# EAGLE board PCB_Grupo_6 (EAGLE 9.6.2)
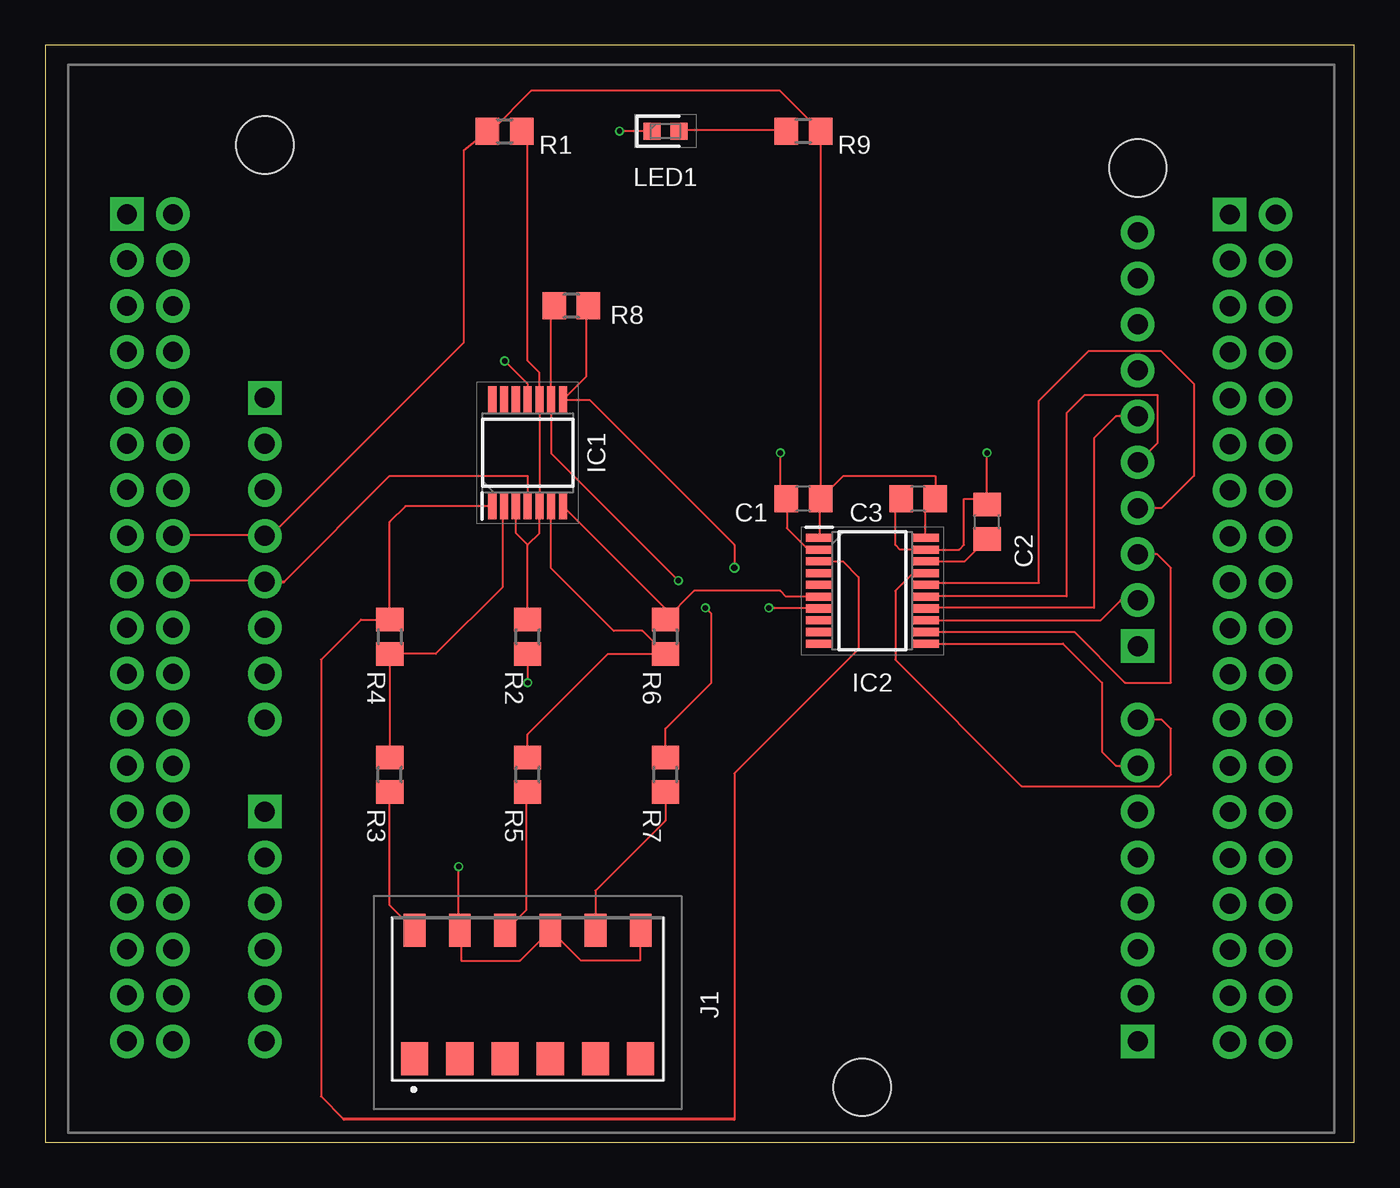
[diagram p0: board, top side]
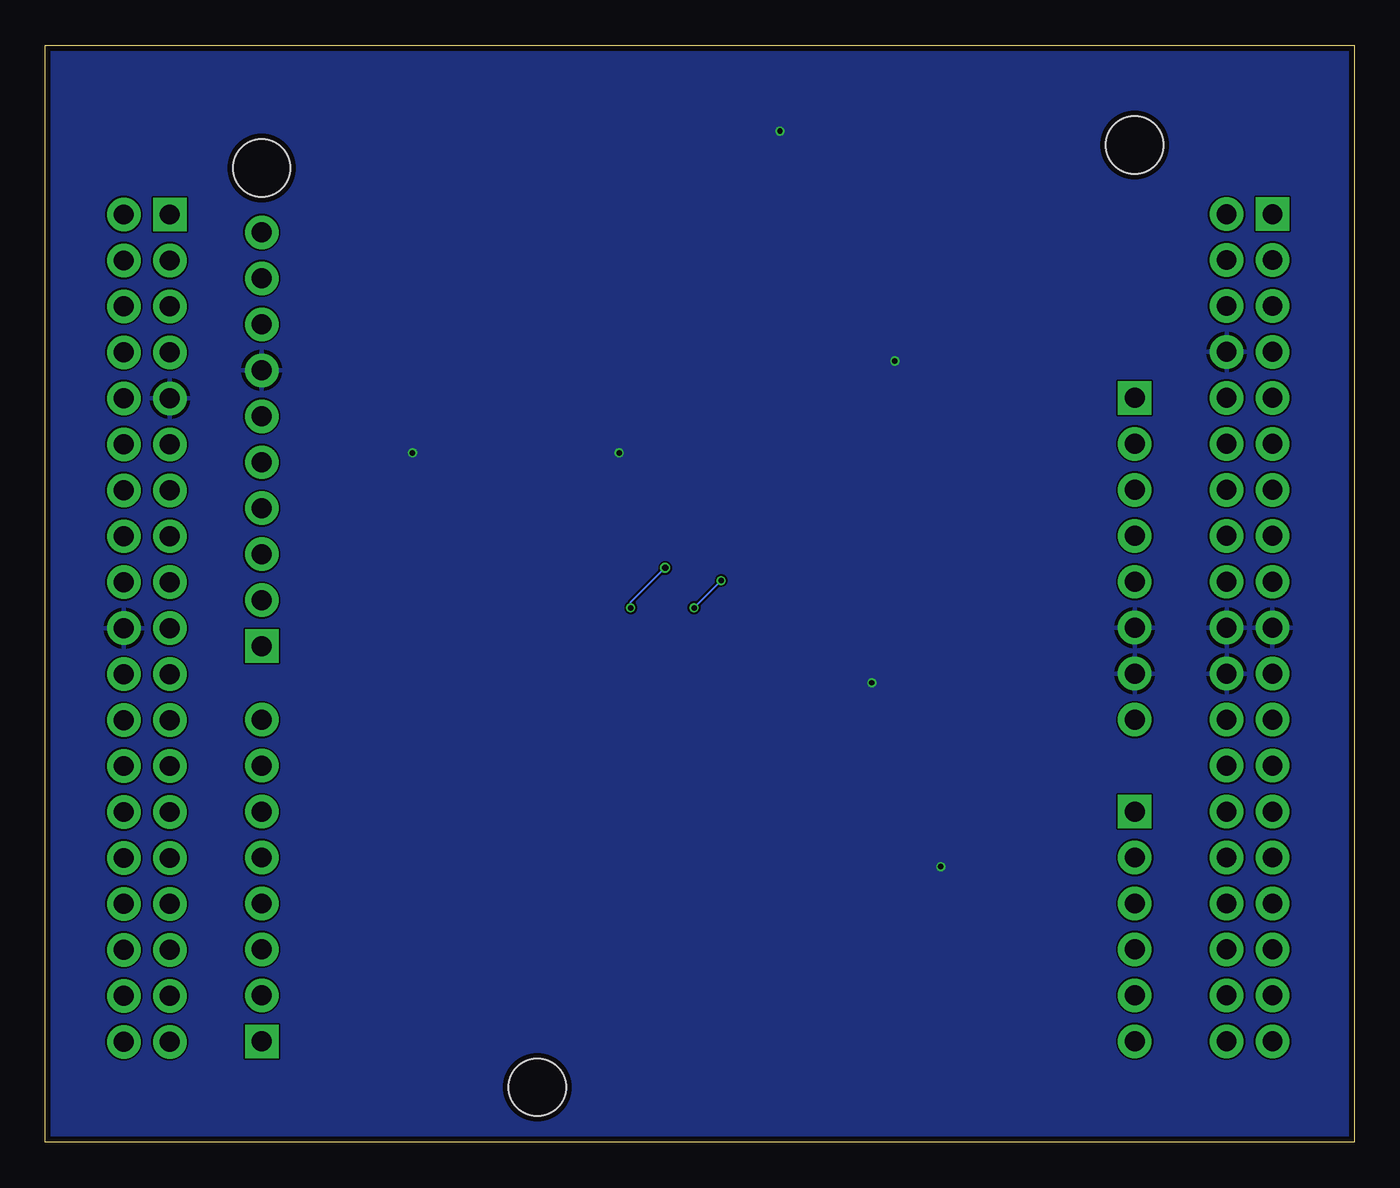
[diagram p1: board, bottom side, seen from below]

Size 72.37 x 60.63 mm. Coordinates in mm from the lower left corner, seen from the top.
Outline: 0,0 72.37,0 72.37,60.63 0,60.63 0,0
Copper layers (1*16): Top 0.035mm / dielectric 1.5mm / Bottom 0.035mm
Design rules "PCBWay_2L_100um-Track *": minimum track width 0.1mm, minimum drill 0.3mm, track to track 0.1mm, track to pad 0.1mm, pad to pad 0.1mm, via to via 0.1mm, smd to smd 0mil, copper to edge 0.3mm, drill to drill 10mil, minimum pad ring 6mil, minimum via ring 0.1mm, stop-mask expansion 2mil, vias tented up to drill 0.3mm, thermal gap 0.2mm

## Footprints (pad centres in the part's own frame; a part is rotated, then mirrored left to right if it is on the bottom)
C0805 = smd 1.3 x 1.5: 1 -0.95,0; 2 0.95,0
SOP65P640X120-14N = smd 1.475 x 0.45: 1 -2.938,1.95; 2 -2.938,1.3; 3 -2.938,0.65; 4 -2.938,0; 5 -2.938,-0.65; 6 -2.938,-1.3; 7 -2.938,-1.95; 8 2.938,-1.95; 9 2.938,-1.3; 10 2.938,-0.65; 11 2.938,0; 12 2.938,0.65; 13 2.938,1.3; 14 2.938,1.95
SOP65P640X120-20N = smd 1.475 x 0.45: 1 -2.938,2.925; 2 -2.938,2.275; 3 -2.938,1.625; 4 -2.938,0.975; 5 -2.938,0.325; 6 -2.938,-0.325; 7 -2.938,-0.975; 8 -2.938,-1.625; 9 -2.938,-2.275; 10 -2.938,-2.925; 11 2.938,-2.925; 12 2.938,-2.275; 13 2.938,-1.625; 14 2.938,-0.975; 15 2.938,-0.325; 16 2.938,0.325; 17 2.938,0.975; 18 2.938,1.625; 19 2.938,2.275; 20 2.938,2.925
009276006021106 = smd 1.5 x 1.8: 1 -6.25,-3; 3 -3.75,-3; 5 -1.25,-3; 7 1.25,-3; 9 3.75,-3; 11 6.25,-3 | smd 1.2 x 1.8: 2 -6.25,4.1; 4 -3.75,4.1; 6 -1.25,4.1; 8 1.25,4.1; 10 3.75,4.1; 12 6.25,4.1
LEDC1608X80N = smd 0.95 x 0.95: 1 -0.75,0; 2 0.75,0
NUCLEO-64 = drill 1.1 pad 1.85 square: CN5-1 59.13,24.884; CN6-1 10.87,38.6; CN7-1 3.25,48.76; CN8-1 10.87,15.74; CN9-1 59.13,3.04; CN10-1 64.21,48.735 | drill 1.1 pad 1.85: CN5-2 59.13,27.424; CN5-3 59.13,29.964; CN5-4 59.13,32.504; CN5-5 59.13,35.044; CN5-6 59.13,37.584; CN5-7 59.13,40.124; CN5-8 59.13,42.664; CN5-9 59.13,45.204; CN5-10 59.13,47.744; CN6-2 10.87,36.06; CN6-3 10.87,33.52; CN6-4 10.87,30.98; CN6-5 10.87,28.44; CN6-6 10.87,25.9; CN6-7 10.87,23.36; CN6-8 10.87,20.82; CN7-2 5.79,48.76; CN7-3 3.25,46.22; CN7-4 5.79,46.22; CN7-5 3.25,43.68; CN7-6 5.79,43.68; CN7-7 3.25,41.14; CN7-8 5.79,41.14; CN7-9 3.25,38.6; CN7-10 5.79,38.6; CN7-11 3.25,36.06; CN7-12 5.79,36.06; CN7-13 3.25,33.52; CN7-14 5.79,33.52; CN7-15 3.25,30.98; CN7-16 5.79,30.98; CN7-17 3.25,28.44; CN7-18 5.79,28.44; CN7-19 3.25,25.9; CN7-20 5.79,25.9; CN7-21 3.25,23.36; CN7-22 5.79,23.36; CN7-23 3.25,20.82; CN7-24 5.79,20.82; CN7-25 3.25,18.28; CN7-26 5.79,18.28; CN7-27 3.25,15.74; CN7-28 5.79,15.74; CN7-29 3.25,13.2; CN7-30 5.79,13.2; CN7-31 3.25,10.66; CN7-32 5.79,10.66; CN7-33 3.25,8.12; CN7-34 5.79,8.12; CN7-35 3.25,5.58; CN7-36 5.79,5.58; CN7-37 3.25,3.04; CN7-38 5.79,3.04; CN8-2 10.87,13.2; CN8-3 10.87,10.66; CN8-4 10.87,8.12; CN8-5 10.87,5.58; CN8-6 10.87,3.04; CN9-2 59.13,5.58; CN9-3 59.13,8.12; CN9-4 59.13,10.66; CN9-5 59.13,13.2; CN9-6 59.13,15.74; CN9-7 59.13,18.28; CN9-8 59.13,20.82; CN10-2 66.75,48.735; CN10-3 64.21,46.195; CN10-4 66.75,46.195; CN10-5 64.21,43.655; CN10-6 66.75,43.655; CN10-7 64.21,41.115; CN10-8 66.75,41.115; CN10-9 64.21,38.575; CN10-10 66.75,38.575; CN10-11 64.21,36.035; CN10-12 66.75,36.035; CN10-13 64.21,33.495; CN10-14 66.75,33.495; CN10-15 64.21,30.955; CN10-16 66.75,30.955; CN10-17 64.21,28.415; CN10-18 66.75,28.415; CN10-19 64.21,25.875; CN10-20 66.75,25.875; CN10-21 64.21,23.335; CN10-22 66.75,23.335; CN10-23 64.21,20.795; CN10-24 66.75,20.795; CN10-25 64.21,18.255; CN10-26 66.75,18.255; CN10-27 64.21,15.715; CN10-28 66.75,15.715; CN10-29 64.21,13.175; CN10-30 66.75,13.175; CN10-31 64.21,10.635; CN10-32 66.75,10.635; CN10-33 64.21,8.095; CN10-34 66.75,8.095; CN10-35 64.21,5.555; CN10-36 66.75,5.555; CN10-37 64.21,3.015; CN10-38 66.75,3.015 | hole 3.175: 59.13,51.3; 10.87,52.57; 43.89,0.5
R0805 = smd 1.3 x 1.5: 1 -0.95,0; 2 0.95,0

## Placement (x,y rotation side)
C1  1uF  [C0805]  41.91,35.56 180 top
C2  220nF  [C0805]  52.07,34.29 90 top
C3  1uF  [C0805]  48.26,35.56 180 top
IC1  AD8574TRUZ-EP  [SOP65P640X120-14N]  26.67,38.1 90 top
IC2  ADS131M03IPWR  [SOP65P640X120-20N]  45.72,30.48 0 top
J1  009276006021106  [009276006021106]  26.67,7.62 0 top
LED1  150060GS75000  [LEDC1608X80N]  34.29,55.88 0 top
M1  [NUCLEO-64]  1.27,2.54 0 top
R1  1k  [R0805]  25.4,55.88 0 top
R2  2k2  [R0805]  26.67,27.94 90 top
R3  1k  [R0805]  19.05,20.32 90 top
R4  2k2  [R0805]  19.05,27.94 270 top
R5  1k  [R0805]  26.67,20.32 90 top
R6  2k2  [R0805]  34.29,27.94 270 top
R7  1k  [R0805]  34.29,20.32 90 top
R8  2k2  [R0805]  29.08,46.23 180 top
R9  12  [R0805]  41.91,55.88 180 top

## Library data of the parts
C1 C3 = rcl; PARTNO: C1206C105K3RAC7215; SPICEPREFIX: C
C2 = rcl; PARTNO: 885382207008; SPICEPREFIX: C
IC1 = SamacSys_Parts; ARROW_PART_NUMBER: AD8574TRUZ-EP; ARROW_PRICE-STOCK: https://www.arrow.com/en/products/ad8574truz-ep/analog-devices?region=nac; DESCRIPTION: Amplificateurs oprationnels - Amplis-Op QUAD PRECISION RAIL RAIL CHOPPER OP AMP; HEIGHT: 1.2mm; MANUFACTURER_NAME: Analog Devices; MANUFACTURER_PART_NUMBER: AD8574TRUZ-EP; MOUSER_PART_NUMBER: 584-AD8574TRUZ-EP; MOUSER_PRICE-STOCK: https://www.mouser.co.uk/ProductDetail/Analog-Devices/AD8574TRUZ-EP?qs=wUXugUrL1qxNfkZ2pBeSrA%3D%3D
IC2 = SamacSys_Parts; DESCRIPTION: Analog to Digital Converters - ADC 24-bit, 32-kSPS, 3-channel, simultaneous-sampling, delta-sigma ADC; HEIGHT: 1.2mm; MANUFACTURER_NAME: Texas Instruments; MANUFACTURER_PART_NUMBER: ADS131M03IPWR; MOUSER_PART_NUMBER: 595-ADS131M03IPWR; MOUSER_PRICE-STOCK: https://www.mouser.co.uk/ProductDetail/Texas-Instruments/ADS131M03IPWR?qs=Jslch3jnSjnSosXolUzTvg%3D%3D
J1 = SamacSys_Parts; ARROW_PART_NUMBER: 009276006021106; ARROW_PRICE-STOCK: https://www.arrow.com/en/products/009276006021106/avx?region=nac; DESCRIPTION: AVX INTERCONNECT - 009276006021106 - CONNECTOR, IDC, 6 WAY, 18 AWG; HEIGHT: 5mm; MANUFACTURER_NAME: AVX; MANUFACTURER_PART_NUMBER: 009276006021106; MOUSER_PART_NUMBER: 581-009276006021106; MOUSER_PRICE-STOCK: https://www.mouser.co.uk/ProductDetail/AVX/009276006021106?qs=QtI0yD1FyOMc2fy6i4jFlw%3D%3D
LED1 = SamacSys_Parts; DESCRIPTION: Wurth Elektronik WL-SMCW 520 nm Green LED, 1608 (0603) Clear SMD package; HEIGHT: 0.8mm; MANUFACTURER_NAME: Wurth Elektronik; MANUFACTURER_PART_NUMBER: 150060GS75000; MOUSER_PART_NUMBER: 710-150060GS75000; MOUSER_PRICE-STOCK: https://www.mouser.co.uk/ProductDetail/Wurth-Elektronik/150060GS75000?qs=LlUlMxKIyB0UYkq5lDO8nA%3D%3D
M1 = NUCLEO-L452RE
R1 R3 R5 R7 = rcl; PARTNO: TNPW04021K15BYEP; SPICEPREFIX: R
R2 R4 R6 R8 = rcl; PARTNO: RP0603BRD072K2L; SPICEPREFIX: R
R9 = rcl; PARTNO: RT0603DRE0712RL; SPICEPREFIX: R

## Nets
+1V: IC1.3 IC1.5 IC1.10 R1.2 R2.2
+3V3: C1.1 C3.1 IC2.1 IC2.20 M1.CN6-4 M1.CN7-16 R1.1 R9.1
+5V: IC1.4 M1.CN6-5 M1.CN7-18
AGND: M1.CN10-32
AVDD: M1.CN10-7
G1+: J1.3
G1-: J1.1
G2+: J1.7
G2-: J1.5
G3+: J1.11
G3-: J1.9
GND: C1.2 C2.2 C3.2 IC1.11 IC2.2 IC2.19 J1.4 J1.8 J1.12 LED1.1 M1.CN5-7 M1.CN6-6 M1.CN6-7 M1.CN7-8 M1.CN7-19 M1.CN7-20 M1.CN7-22 M1.CN10-9 M1.CN10-20 R2.1
N$1: IC1.1 IC2.3 R4.1
N$2: IC1.7 IC2.6 R6.1
N$3: IC1.8 IC2.7 R8.1
N$4: IC1.2 R3.2 R4.2
N$5: M1.CN6-2
N$6: IC1.9 R7.2 R8.2
N$7: IC1.6 R5.2 R6.2
N$8: M1.CN6-8
N$9: M1.CN5-8
N$10: J1.2 R3.1
N$11: IC2.14 M1.CN5-6
N$12: J1.6 R5.1
N$13: IC2.4
N$14: J1.10 R7.1
N$15: IC2.13 M1.CN5-2
N$16: IC2.12 M1.CN5-3
N$17: LED1.2 R9.2
N$18: M1.CN6-3
N$19: IC1.14
N$20: IC1.13
N$21: IC1.12
N$22: IC2.9
N$23: IC2.10
N$24: IC2.5
N$25: IC2.8
N$26: C2.1 IC2.18
N$27: IC2.17 M1.CN9-8
N$28: IC2.11 M1.CN9-7
N$29: IC2.16 M1.CN5-4
N$30: IC2.15 M1.CN5-5
N$33: M1.CN9-6
N$34: M1.CN9-5
N$35: M1.CN9-4
N$36: M1.CN9-3
N$37: M1.CN9-2
N$38: M1.CN9-1
N$39: M1.CN5-1
N$41: M1.CN5-10
N$42: M1.CN5-9
U5V: M1.CN10-8
VBAT: M1.CN7-33
VDD: M1.CN7-5
VIN: M1.CN7-24

## Tracks (layer width: path | path; a pad name or v marks a point on that pad's centre or on a via)
+1V
  Top 0.1: 27.3,35.14 IC1.5 | R1.2 26.67,55.56 26.67,43.18 27.32,42.53 IC1.10 IC1.5 27.32,33.67 26.67,33.02 | 26.67,33.02 26.02,33.67 IC1.3 | R2.2 26.67,33.02
  Top 0.152: IC1.5 27.3,35.14
+3V3
  Top 0.1: C1.1 42.8,35.47 42.8,33.44 IC2.1 | C1.1 42.9,35.57 42.86,35.61 R9.1 40.63,58.11 26.87,58.11 24.7,55.94 24.5,55.94 R1.1 23.13,54.82 23.13,44.2 12.45,33.52 M1.CN6-4 12.1,33.54 7.1,33.54 M1.CN7-16 | IC2.20 48.66,35.01 C3.1 49.21,36.83 44.13,36.83 C1.1
+5V
  Top 0.1: M1.CN7-18 7.1,31.04 12.1,31.04 M1.CN6-5 | 13.2,30.98 19.05,36.83 26.67,36.83 IC1.4
  Top 0.152: M1.CN6-5 13.2,30.98
GND  (via drill 0.3)
  Top 0.1: v22.86,15.24 22.86,11.78 J1.4 23,11.66 23,10.04 26.25,10.04 27.88,11.66 J1.8 | J1.8 27.94,11.74 | 33.02,11.82 J1.12 32.88,11.66 32.88,10.04 29.62,10.04 28,11.66 J1.8 | R2.1 v26.67,25.4 | v25.4,43.18 26.67,41.91 IC1.11 | LED1.1 v31.75,55.88 | C2.2 52.07,35.56 | 52.07,35.56 v52.07,38.1 | IC2.2 42.7,32.84 42.1,32.84 41,33.94 41,35.47 C1.2 40.64,35.88 v40.64,38.1 | 48.7,32.84 IC2.19 | IC2.19 50.53,32.76 50.8,33.02 50.8,35.56 52.07,35.56 | 46.99,35.88 C3.2 47.15,35.4 | IC2.19 47.26,32.76 46.99,33.02 46.99,35.24
  Top 0.152: 46.99,35.24 47.15,35.4
  pour Bottom: 0,2.54 0,0 72.39,0 72.39,60.96 0,60.96
N$1
  Top 0.1: IC1.1 19.92,35.16 19.05,34.29 R4.1 17.46,28.89 15.24,26.67 15.24,2.54 16.51,1.27 | 38.1,1.27 38.1,20.39 44.97,27.26 44.97,31.23 44.09,32.11 IC2.3
  Top 0.152: 38.1,1.27 16.51,1.27
N$2
  Top 0.1: IC1.7 28.75,35.04 34.25,29.54 34.25,29.04 R6.1 35.88,30.48 40.64,30.48 40.97,30.15 IC2.6
N$3  (via drill 0.3, 0.35)
  Top 0.1: R8.1 29.89,46.09 29.89,42.31 IC1.8 30.08,41.04 30.48,40.64 38.1,33.02 v38.1,31.75 | v40,29.54 42.75,29.54 IC2.7
  Bottom 0.1: v40,29.54 40,29.85 v38.1,31.75
N$4
  Top 0.1: R3.2 R4.2 21.59,26.99 25.3,30.7 25.3,35.14 IC1.2
N$6  (via drill 0.3)
  Top 0.1: R8.2 27.97,46.06 IC1.9 27.97,38.07 v35,31.04 | R7.2 34.29,22.86 36.83,25.4 36.83,29.21 v36.5,29.54
  Bottom 0.1: v35,31.04 v36.5,29.54
N$7
  Top 0.1: R5.2 26.67,22.54 31.12,26.99 R6.2 33.02,28.26 31.43,28.26 27.94,31.75 27.94,35.13 IC1.6
N$10
  Top 0.1: J1.2 19.05,13.09 R3.1
N$11
  Top 0.1: M1.CN5-6 59.19,40.12 57.98,38.91 57.98,29.54 48.75,29.54 IC2.14
N$12
  Top 0.1: R5.1 26.6,19.34 26.6,12.84 25.5,11.74 J1.6
N$14
  Top 0.1: R7.1 34.29,17.78 30.42,13.91 J1.10
N$15
  Top 0.1: 59.47,29.96 58.36,28.86 IC2.13
  Top 0.152: M1.CN5-2 59.47,29.96
N$16
  Top 0.1: M1.CN5-3 61.48,32.5 62.23,31.75 62.23,25.4 59.69,25.4 56.88,28.2 IC2.12
N$17
  Top 0.1: LED1.2 35.1,55.94 40.9,55.94 R9.2
N$26
  Top 0.1: IC2.18 50.84,32.11 C2.1
N$27
  Top 0.1: IC2.17 47.97,31.45 46.99,30.48 46.99,26.67 53.98,19.68 61.59,19.68 62.23,20.32 62.23,22.86 61.73,23.36 M1.CN9-8
N$28
  Top 0.1: IC2.11 56.27,27.55 58.42,25.4 58.42,21.59 59.19,20.82 M1.CN9-7
N$29
  Top 0.1: IC2.16 48.75,30.91 54.94,30.91 54.94,40.97 57.71,43.74 61.67,43.74 63.5,41.91 63.5,36.83 61.71,35.04 M1.CN5-4
N$30
  Top 0.1: IC2.15 48.75,30.16 56.46,30.16 56.46,40.29 57.46,41.29 61.5,41.29 61.5,38.66 60.5,37.66 M1.CN5-5